# Altium PCB PCB_AIO.PcbDoc (part 1 of 2)
Units mm, origin at the board's own origin, x right, y up, seen from the top; angles counter-clockwise.
Board outline 99.69 x 91.46 mm, 2 copper layers (Top Layer, Bottom Layer), stack 0.325 mm thick; 117 components, 99 nets, 490 pads, 154 vias.
Unrouted connection lines stored in the file: 95.
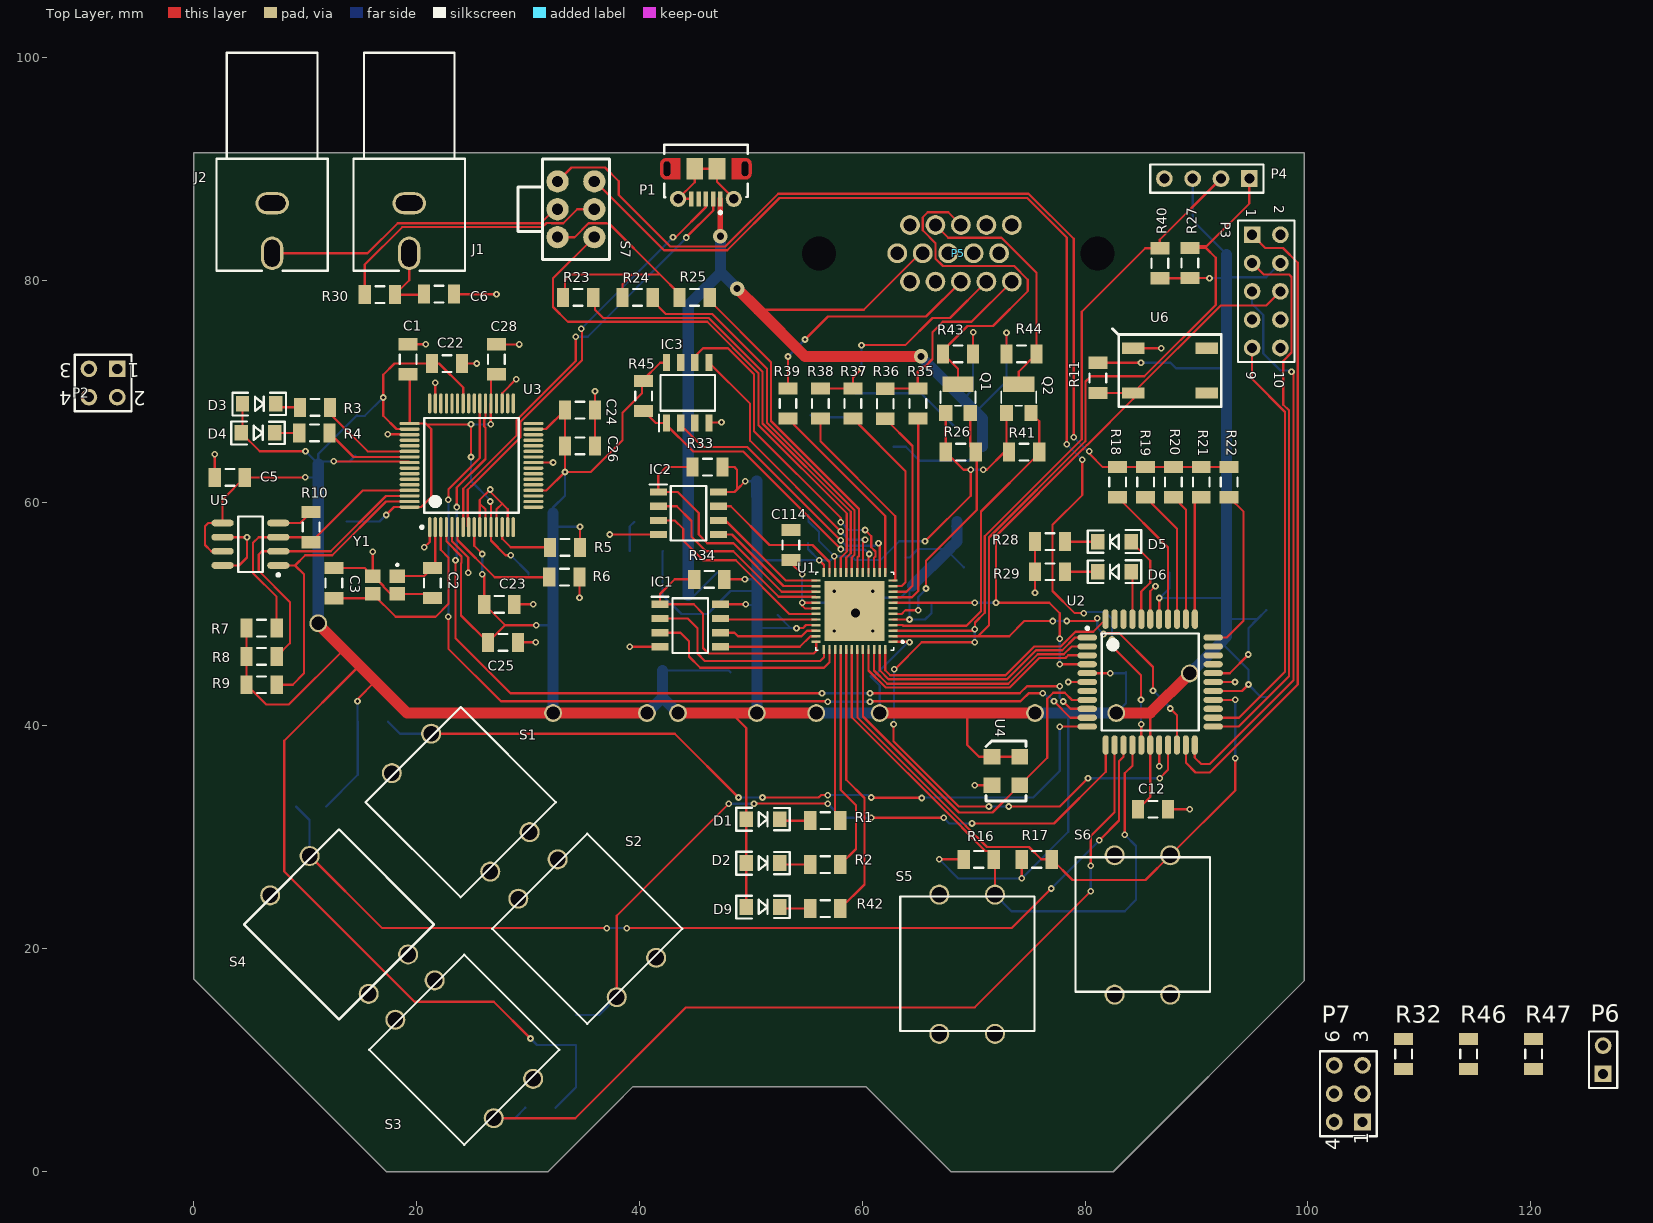
[diagram p0: Top Layer view]
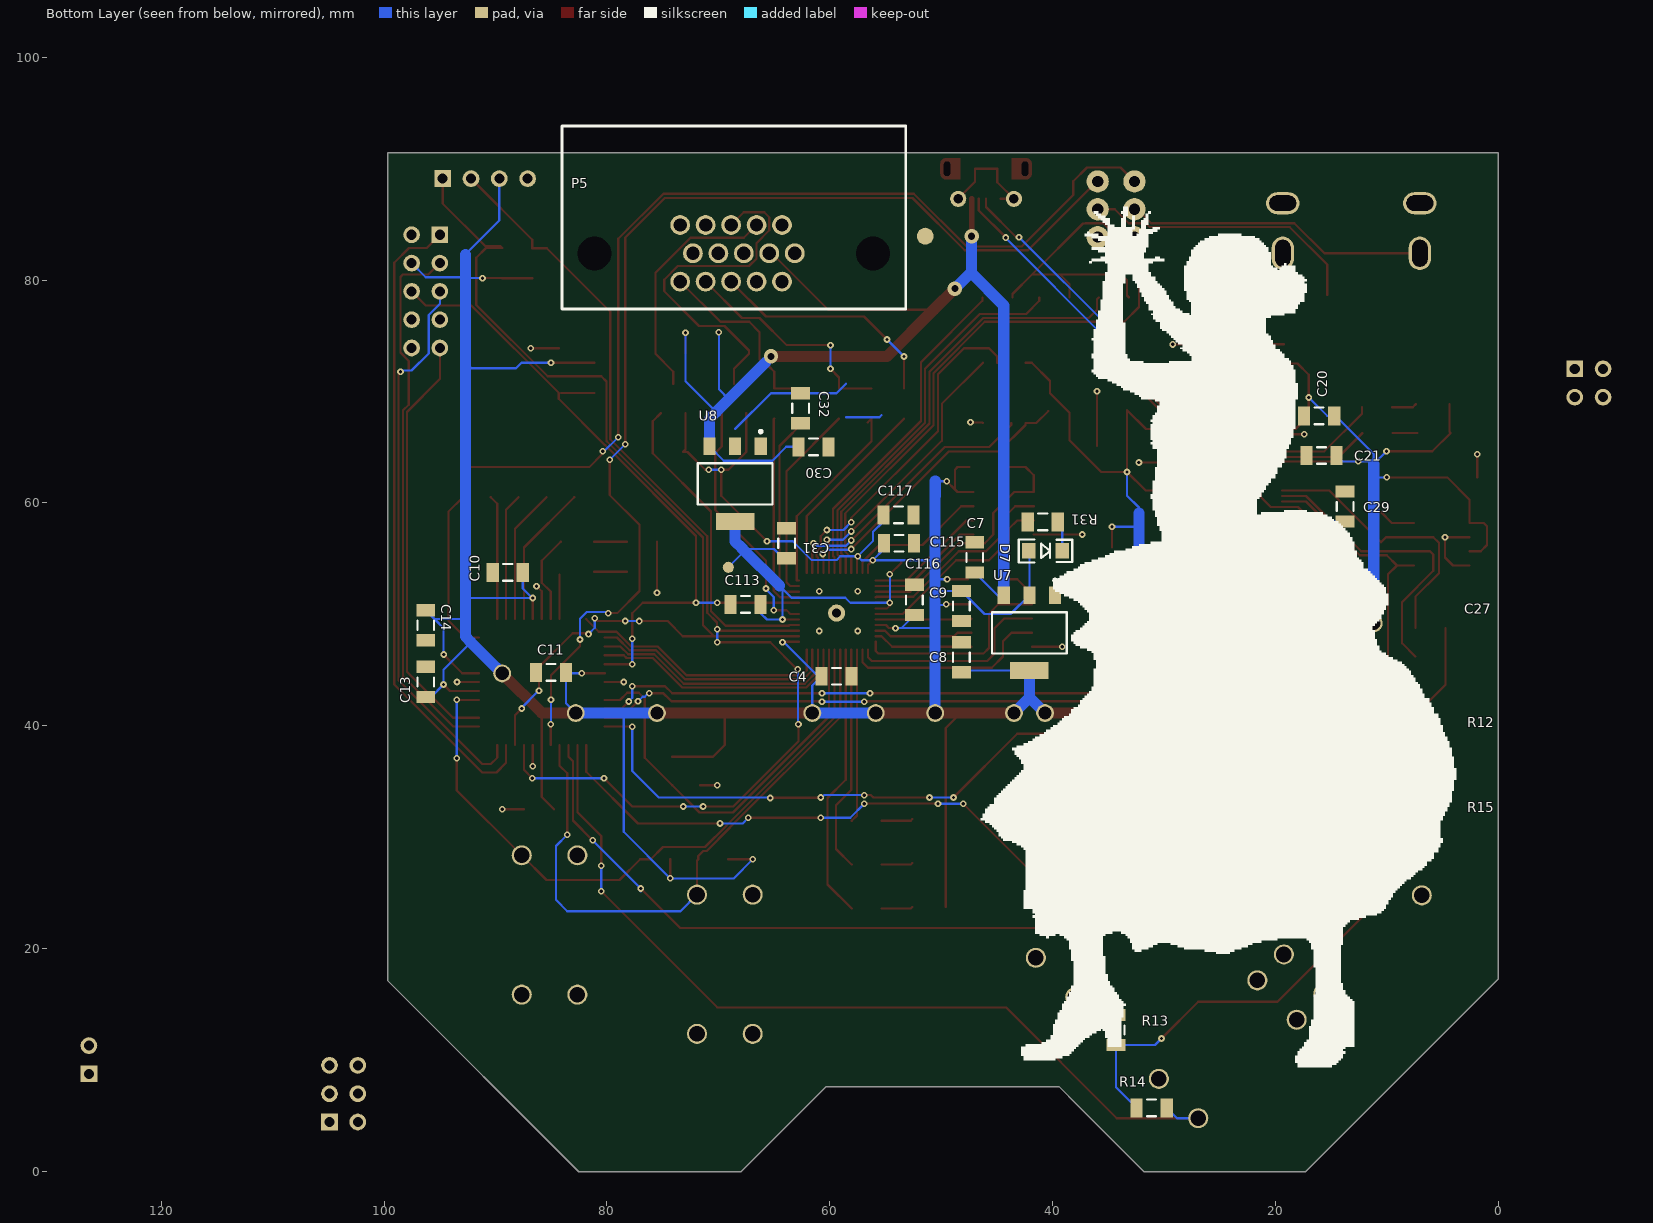
[diagram p1: Bottom Layer view, seen from below]

## Layer stack, top to bottom
Top Solder: solder mask 0.0102, Solder Resist, Dk 3.5
Top Layer: signal copper 0.0356
Dielectric 1: core 0.254, FR-4, Dk 4.2
Bottom Layer: signal copper 0.0356
Bottom Solder: solder mask 0.0102, Solder Resist, Dk 3.5

## Board outline
17.285,0 0,17.285 0,91.44 99.695,91.44 99.695,17.145 82.535,-0.015 67.96,-0.015 60.325,7.62 39.435,7.62 37.7,5.885 31.815,0
cut-out: 0,17.78

## Design rules (kind name [scope] priority, off if disabled: settings)
AssemblyTestpoint [All] p1: testpointundercomponent=TRUE minsize=1 maxsize=2.5 preferedsize=1.5 minholesize=0 maxholesize=1.016 preferedholesize=0.8 testpointgrid=0.025 usegrid=TRUE gridtolerance=0 allowsidetop=TRUE allowsidebottom=TRUE
Clearance [All] p1: gap=0.15 ignorepadtopadclearanceinfootprint=FALSE except(0: Arc-Hole Track-Hole SMDPad-Hole THPad-Hole Via-Hole Fill-Hole Poly-Hole Region-Hole Text-Hole; 0.3: Arc-Poly Track-Poly SMDPad-Poly THPad-Poly Via-Poly Fill-Poly Poly-Poly)
FabricationTestpoint [All] p1: side=3 testpointundercomponent=TRUE minsize=1 maxsize=2.54 preferedsize=1.5 minholesize=0 maxholesize=1.016 preferedholesize=0.8 testpointgrid=0.025 allowsidetop=TRUE allowsidebottom=TRUE usegrid=TRUE gridtolerance=0
HoleSize [All] p1: absolutevalues=TRUE maxlimit=4 minlimit=0.3 maxpercent=80.000 minpercent=20.000
HoleToHoleClearance [All] p1: gap=0.2 allowstackedmicrovias=TRUE
MinimumSolderMaskSliver [All] p1: minsoldermaskwidth=0.025
PlaneClearance [All] p1: clearance=0.4
PlaneConnect [All] p1: planeconnectstyle=Relief reliefexpansion=0.4 reliefentries=4 reliefconductorwidth=0.25 reliefairgap=0.2
PolygonConnect [All] p1: connectstyle=Relief reliefconductorwidth=0.25 reliefentries=4 polygonreliefangle="90 Angle" airgapwidth=0.25
RoomDefinition Arriquitaun2 [InComponentClass('Arriquitaun2')] p1: confinementstyle=ConfineIn formatcopy=TRUE lockcomponents=FALSE outline -25.4,-43.815 25.4,-43.815 25.4,-18.415 -25.4,-18.415
RoutingVias [All] p1: holewidth=0.3 width=0.6 viastyle="Through Hole" minholewidth=0.3 minwidth=0.6 maxholewidth=0.5 maxwidth=1
SilkToSilkClearance [All] p1: silktosilkclearance=0.2
SilkToSolderMaskClearance [IsPad] p1: minsilkscreentomaskgap=0.05 clearancetoexposedcopper=TRUE
SolderMaskExpansion [All] p1: expansion=0.102
Width [All] p1: maxlimit=1 minlimit=0.15 preferedwidth=0.2
21 further rules are at their usual default settings.

## Classes and differential pairs
component class Arriquitaun2: C1 C2 C3 C5 C6 C7 C8 C9 C10 C11 C12 C13 C14 C20 C21 C22 C23 C24 C25 C26 C27 C28 C29 C30 C31 C32 C113 C114 C115 C116 C117 D3 D4 D7 J1 J2 J3 P1 P3 P4 R3 R4 R5 R6 R7 R8 R9 R10 R27 R30 R31 R40 S7 U3 U5 U7 U8 Y1
component class Arriquitaun: C4 D1 D2 D5 D6 D9 IC1 IC2 IC3 P2 P5 P6 P7 Q1 Q2 R1 R2 R11 R12 R13 R14 R15 R16 R17 R18 R19 R20 R21 R22 R23 R24 R25 R26 R28 R29 R32 R33 R34 R35 R36 R37 R38 R39 R41 R42 R43 R44 R45 R46 R47 S1 S2 S3 S4 S5 S6 U1 U2 U4 U6

## Components (designator, comment, footprint, x,y, rotation, side; value= is the part's Value field where it differs from the comment)
C1 "Cap Pol1" C1206 19.245,72.898 r90 top value=10uF
C2 "Cap Semi" C1206 21.431,52.819 r270 top value=22pF
C3 "Cap Semi" C1206 12.581,52.806 r270 top value=22pF
C4 "Cap Semi" C1206 59.395,44.45 r0 bottom value=100nF
C5 "Cap Semi" C1206 3.246,62.3 r0 top value=100nF
C6 "Cap Semi" C1206 22.025,78.74 r180 top value=100nF
C7 "Cap Pol1" C1206 46.99,55.118 r90 bottom value=10uF
C8 "Cap Pol1" C1206 48.188,46.151 r90 bottom value=10uF
C9 "Cap Semi" C1206 48.188,50.751 r90 bottom value=100nF
C10 "Cap Semi" C1206 88.9,53.768 r180 bottom value=100nF
C11 "Cap Semi" C1206 85.028,44.801 r180 bottom value=100nF
C12 "Cap Semi" C1206 86.106,32.512 r180 top value=100nF
C13 "Cap Semi" C1206 96.266,43.942 r270 bottom value=100nF
C14 "Cap Semi" C1206 96.266,49.022 r90 bottom value=100nF
C20 "Cap Semi" C1206 16.081,67.818 r180 bottom value=100nF
C21 "Cap Semi" C1206 15.875,64.262 r180 bottom value=100nF
C22 "Cap Semi" C1206 22.733,72.517 r180 top value=100nF
C23 "Cap Semi" C1206 27.432,50.903 r180 top value=100nF
C24 "Cap Semi" C1206 34.671,68.33 r180 top value=100nF
C25 "Cap Semi" C1206 27.766,47.498 r180 top value=100nF
C26 "Cap Semi" C1206 34.671,65.133 r180 top value=100nF
C27 "Cap Semi" C1206 28.702,53.594 r0 bottom value=100nF
C28 "Cap Semi" C1206 27.178,72.898 r270 top value=100nF
C29 "Cap Semi" C1206 13.746,59.69 r270 bottom value=100nF
C30 "Cap Pol1" C1206 61.468,65.042 r180 bottom value=10uF
C31 "Cap Pol1" C1206 63.877,56.388 r90 bottom value=10uF
C32 "Cap Semi" C1206 62.611,68.507 r90 bottom value=100nF
C113 "Cap Semi" C1206 67.564,50.903 r180 bottom value=100nF
C114 "Cap Semi" C1206 53.594,56.226 r270 top value=100nF
C115 "Cap Semi" C1206 53.784,56.388 r0 bottom value=100nF
C116 "Cap Semi" C1206 52.409,51.308 r270 bottom value=100nF
C117 "Cap Semi" C1206 53.84,58.928 r0 bottom value=100nF
D1 "5988210107F" "1206 - LED" 51.099,31.628 r0 top
D2 "5988210107F" "1206 - LED" 51.099,27.686 r0 top
D3 "5988210107F" "1206 - LED" 5.883,68.89 r0 top
D4 "5988210107F" "1206 - LED" 5.783,66.29 r0 top
D5 "5988210107F" "1206 - LED" 82.647,56.53 r180 top
D6 "5988210107F" "1206 - LED" 82.647,53.83 r180 top
D7 "5988210107F" "1206 - LED" 40.635,55.702 r180 bottom
D9 "5988210107F" "1206 - LED" 51.099,23.745 r0 top
IC1 "IS62WVS2568FBLL-20NLI" SOIC127P600X175-8N 44.573,48.998 r0 top
IC2 "AT25SF041-SSHD-T" SOIC127P600X175-8N 44.411,59.073 r0 top
IC3 "AT25SF041-SSHD-T" SOIC127P600X175-8N 44.347,69.882 r90 top
J1 "RCA" 161 19.344,90.905 r90 top
J2 "RCA" 161 7.044,90.905 r90 top
P1 "47346-0001" USB-MICRO-B_V 45.974,88.646 r180 top
P2 "Header 2X2" HDR2X2 -6.858,72.04 r180 top
P3 "Header 5X2" HDR2X5 94.996,84.074 r270 top
P4 "Header 4" HDR1X4 94.742,89.114 r180 top
P5 "L77HDE15SD1CO" DVI-15 68.604,82.409 r180 top
P6 "Header 2" HDR1X2 126.492,8.763 r90 top
P7 "Header 3X2A" HDR2X3_CEN 104.902,4.445 r90 top
Q1 "BSS138P" *SOT23-W 68.604,69.375 r0 top
Q2 "BSS138P" *SOT23-W 74.051,69.375 r0 top
R1 "Res3" c1206 56.689,31.485 r180 top value=1K
R2 "Res3" c1206 56.689,27.543 r180 top value=1K
R3 "Res3" c1206 10.883,68.59 r180 top value=1K
R4 "Res3" c1206 10.833,66.29 r180 top value=1K
R5 "Res3" c1206 33.321,56.019 r180 top value=1K
R6 "Res3" c1206 33.274,53.34 r0 top value=12K
R7 "Res3" c1206 6.096,48.77 r180 top value=10K
R8 "Res3" c1206 6.096,46.23 r180 top value=10K
R9 "Res3" c1206 6.096,43.69 r180 top value=10K
R10 "Res3" c1206 10.541,57.835 r90 top value=10K
R11 "Res3" c1206 81.147,71.232 r270 top value=10K
R12 "Res3" c1206 16.081,40.386 r0 bottom value=10K
R13 "Res3" c1206 34.309,12.7 r90 bottom value=10K
R14 "Res3" c1206 31.115,5.715 r180 bottom value=10K
R15 "Res3" c1206 10.541,32.766 r180 bottom value=10K
R16 "Res3" c1206 70.461,28.02 r0 top value=10K
R17 "Res3" c1206 75.664,28.02 r0 top value=10K
R18 "Res3" c1206 82.93,61.87 r90 top value=10K
R19 "Res3" c1206 85.43,61.87 r90 top value=10K
R20 "Res3" c1206 87.93,61.87 r90 top value=10K
R21 "Res3" c1206 90.43,61.87 r90 top value=10K
R22 "Res3" c1206 92.93,61.87 r90 top value=10K
R23 "Res3" c1206 34.503,78.449 r180 top value=10K
R24 "Res3" c1206 39.843,78.449 r180 top value=10K
R25 "Res3" c1206 44.958,78.449 r180 top value=10K
R26 "Res3" c1206 68.85,64.576 r0 top value=10K
R27 "Res3" c1206 89.408,81.534 r90 top value=10K
R28 "Res3" c1206 76.862,56.53 r0 top value=1K
R29 "Res3" c1206 76.862,53.83 r0 top value=1K
R30 "Res3" c1206 16.709,78.7 r0 top value=10K
R31 "Res3" c1206 40.885,58.302 r180 bottom value=1K
R32 "Res3" c1206 108.585,10.541 r90 top value=10K
R33 "Res3" c1206 46.111,63.225 r180 top value=10K
R34 "Res3" c1206 46.273,53.149 r180 top value=10K
R35 "Res3" c1206 64.991,68.933 r270 top value=1K
R36 "Res3" c1206 62.068,68.912 r270 top value=510
R37 "Res3" c1206 59.166,68.933 r270 top value=1K
R38 "Res3" c1206 56.254,68.933 r270 top value=510
R39 "Res3" c1206 53.341,68.933 r270 top value=510
R40 "Res3" c1206 86.709,81.52 r90 top value=10K
R41 "Res3" c1206 74.531,64.576 r0 top value=10K
R42 "Res3" c1206 56.689,23.602 r180 top value=1K
R43 "Res3" c1206 68.604,73.39 r180 top value=10K
R44 "Res3" c1206 74.299,73.39 r0 top value=10K
R45 "Res3" c1206 40.386,69.596 r270 top value=10K
R46 "Res3" c1206 114.427,10.541 r90 top value=10K
R47 "Res3" c1206 120.269,10.541 r90 top value=10K
S1 "FSM100" FSM100 30.156,30.456 r135 top
S2 "FSM100" FSM100 29.134,24.484 r315 top
S3 "FSM100" FSM100 18.096,13.623 r315 top
S4 "FSM100" FSM100 19.245,19.482 r135 top
S5 "FSM100" FSM100 71.92,12.353 r90 top
S6 "FSM100" FSM100 87.65,15.883 r90 top
S7 "STSSS2222" SWITCH 34.309,86.36 r90 top
U1 "ICE40UP5K-SG48ITR50" *QFN50P700X700X100-49N_ICE40UP5K-SG48ITR50(Primary) 59.318,50.292 r180 top
U2 "ATmega644PA-AUR" 44A_N 85.852,43.929 r0 top
U3 "FT2232HL-Tray" LQFP-64_N 24.936,63.383 r90 top
U4 "7C-8.000MBB-T" OSCILADOR 72.898,35.953 r270 top
U5 "M93C46-WMN6P" SOP8_N 5.096,56.3 r0 top
U6 "EVQ-Q2D01W" PUSHBUTTON 87.63,71.882 r0 top
U7 "LD1117S33CTR" ZZ311 42.088,48.351 r180 bottom
U8 "TLV117112DCYR" ZZ311 68.5,61.708 r180 bottom
Y1 "NX3225SA-12MHZ" NX3225SA12000MHZSTDCSR1 17.181,52.641 r180 top

## Footprints (in the part's own frame and the unit in brackets; to place one, negate y for a bottom-side part, rotate by r counter-clockwise, add the part's x,y. Pads: shape width x height; smd on the part's side, far side on the other; paste and mask are expansions set on the pad)
44A_N [mm] "Thin QFP, 44-Leads, Body 10x10mm, Pitch 0.8mm, IPC Medium Density"
  oval 1.75x0.55 smd: 1(-5.65,4) 2(-5.65,3.2) 3(-5.65,2.4) 4(-5.65,1.6) 5(-5.65,0.8) 6(-5.65,0) 7(-5.65,-0.8) 8(-5.65,-1.6) 9(-5.65,-2.4) 10(-5.65,-3.2) 11(-5.65,-4) 23(5.65,-4) 24(5.65,-3.2) 25(5.65,-2.4) 26(5.65,-1.6) 27(5.65,-0.8) 28(5.65,0) 29(5.65,0.8) 30(5.65,1.6) 31(5.65,2.4) 32(5.65,3.2) 33(5.65,4)
  oval 0.55x1.75 smd: 12(-4,-5.65) 13(-3.2,-5.65) 14(-2.4,-5.65) 15(-1.6,-5.65) 16(-0.8,-5.65) 17(0,-5.65) 18(0.8,-5.65) 19(1.6,-5.65) 20(2.4,-5.65) 21(3.2,-5.65) 22(4,-5.65) 34(4,5.65) 35(3.2,5.65) 36(2.4,5.65) 37(1.6,5.65) 38(0.8,5.65) 39(0,5.65) 40(-0.8,5.65) 41(-1.6,5.65) 42(-2.4,5.65) 43(-3.2,5.65) 44(-4,5.65)
  silkscreen extent -5.77,-4.35 4.35,4.95, body extent -5,-5 5,5, height 1.2
161 [mil] "Two Conductor Jack (RCA), Right Angle, Thru-Hole, Body 10 x 10 x 13 mm (WxTxH)"
  oval 78x118 hole 55 slot 95 at 90 deg: 1A(-157.48,0)
  oval 118.11x78.74 hole 55 slot 95 at 0 deg: 2B(-334.49,0)
  silkscreen extent -397,-197 374,197
"1206 - LED" [mm]
  rect 1.2x1.4 smd paste+0.2: 1(-1.5,0) 2(1.5,0)
  silkscreen extent -2.4,-1.04 2.4,1.02
*QFN50P700X700X100-49N_ICE40UP5K-SG48ITR50(Primary) [mm]
  rect 0.81x0.22 smd: 1(-3.45,2.75) 2(-3.45,2.25) 3(-3.45,1.75) 4(-3.45,1.25) 5(-3.45,0.75) 6(-3.45,0.25) 7(-3.45,-0.25) 8(-3.45,-0.75) 9(-3.45,-1.25) 10(-3.45,-1.75) 11(-3.45,-2.25) 12(-3.45,-2.75) 25(3.45,-2.75) 26(3.45,-2.25) 27(3.45,-1.75) 28(3.45,-1.25) 29(3.45,-0.75) 30(3.45,-0.25) 31(3.45,0.25) 32(3.45,0.75) 33(3.45,1.25) 34(3.45,1.75) 35(3.45,2.25) 36(3.45,2.75)
  rect 0.22x0.81 smd: 13(-2.75,-3.45) 14(-2.25,-3.45) 15(-1.75,-3.45) 16(-1.25,-3.45) 17(-0.75,-3.45) 18(-0.25,-3.45) 19(0.25,-3.45) 20(0.75,-3.45) 21(1.25,-3.45) 22(1.75,-3.45) 23(2.25,-3.45) 24(2.75,-3.45) 37(2.75,3.45) 38(2.25,3.45) 39(1.75,3.45) 40(1.25,3.45) 41(0.75,3.45) 42(0.25,3.45) 43(-0.25,3.45) 44(-0.75,3.45) 45(-1.25,3.45) 46(-1.75,3.45) 47(-2.25,3.45) 48(-2.75,3.45)
  rect 5.4x5.4 smd: EP(0,0)
  silkscreen extent -4.41,-3.5 3.5,3.5
*SOT23-W [mm]
  rect 1.2x1.4 smd: 1(-1.1,-1.3) 2(1.1,-1.3)
  rect 2.8x1.4 smd: 3(0,1.3)
  silkscreen extent -1.57,-0.66 1.57,0.66
C1206 [mm] "Chip Capacitor, Body 3.2x1.6mm, IPC High Density"
  rect 1.1x1.7 smd: 1(-1.35,0) 2(1.35,0)
  silkscreen extent -0.4,-0.75 0.4,0.75, body extent -1.7,-0.9 1.7,0.9, height 1.3
c1206 [mm] "Chip Capacitor, Body 3.2x1.6mm, IPC High Density"
  rect 1.1x1.7 smd: 1(-1.35,0) 2(1.35,0)
  silkscreen extent -0.4,-0.75 0.4,0.75, body extent -1.7,-0.9 1.7,0.9, height 1.3
DVI-15 [mil]
  round 70 hole 47: 1(-190,100) 2(-100,100) 3(-10,100) 4(80,100) 5(170,100) 6(-145,0) 7(-55,0) 8(35,0) 9(125,0) 10(215,0) 11(-190,-100) 12(-100,-100) 13(-10,-100) 14(80,-100) 15(170,-100)
  round 0 hole 120 unplated: ""(-492,0) ""(492,0)
FSM100 [mm] "Switch button"
  round 1.8 hole 1.4: 0(0,0) 1(12.5,0) 2(12.5,5) 3(0,5)
  silkscreen extent 0.25,-3.56 12.32,8.51
HDR1X2 [mm] "Connector; Header; 2 Position"
  rect 1.5x1.5 hole 0.9: 1(0,0)
  round 1.5 hole 0.9: 2(2.54,0)
  silkscreen extent -1.27,-1.27 3.81,1.27
HDR1X4 [mm] "Connector; Header; 4 Position"
  rect 1.5x1.5 hole 0.9: 1(0,0)
  round 1.5 hole 0.9: 2(2.54,0) 3(5.08,0) 4(7.62,0)
  silkscreen extent -1.27,-1.27 8.89,1.27
HDR2X2 [mm] "Connector; Header; 2x2 Position"
  rect 1.5x1.5 hole 0.9: 1(0,0)
  round 1.5 hole 0.9: 2(0,2.54) 3(2.54,0) 4(2.54,2.54)
  silkscreen extent -1.27,-1.27 3.81,3.81
HDR2X3_CEN [mm] "Connector; Header; 3x2 Position"
  rect 1.5x1.5 hole 0.9: 1(0,0)
  round 1.5 hole 0.9: 2(2.54,0) 3(5.08,0) 4(0,2.54) 5(2.54,2.54) 6(5.08,2.54)
  silkscreen extent -1.27,-1.27 6.35,3.81
HDR2X5 [mm] "Connector; Header; 5x2 Position"
  rect 1.5x1.5 hole 0.9: 1(0,0)
  round 1.5 hole 0.9: 2(0,2.54) 3(2.54,0) 4(2.54,2.54) 5(5.08,0) 6(5.08,2.54) 7(7.62,0) 8(7.62,2.54) 9(10.16,0) 10(10.16,2.54)
  silkscreen extent -1.27,-1.27 11.43,3.81
LQFP-64_N [mm] "Thin QFP, 64-Leads, Body 10x10mm, Pitch 0.5mm, IPC Medium Density"
  oval 1.8x0.3 smd: 1(-5.55,3.75) 2(-5.55,3.25) 3(-5.55,2.75) 4(-5.55,2.25) 5(-5.55,1.75) 6(-5.55,1.25) 7(-5.55,0.75) 8(-5.55,0.25) 9(-5.55,-0.25) 10(-5.55,-0.75) 11(-5.55,-1.25) 12(-5.55,-1.75) 13(-5.55,-2.25) 14(-5.55,-2.75) 15(-5.55,-3.25) 16(-5.55,-3.75) 33(5.55,-3.75) 34(5.55,-3.25) 35(5.55,-2.75) 36(5.55,-2.25) 37(5.55,-1.75) 38(5.55,-1.25) 39(5.55,-0.75) 40(5.55,-0.25) 41(5.55,0.25) 42(5.55,0.75) 43(5.55,1.25) 44(5.55,1.75) 45(5.55,2.25) 46(5.55,2.75) 47(5.55,3.25) 48(5.55,3.75)
  oval 0.3x1.8 smd: 17(-3.75,-5.55) 18(-3.25,-5.55) 19(-2.75,-5.55) 20(-2.25,-5.55) 21(-1.75,-5.55) 22(-1.25,-5.55) 23(-0.75,-5.55) 24(-0.25,-5.55) 25(0.25,-5.55) 26(0.75,-5.55) 27(1.25,-5.55) 28(1.75,-5.55) 29(2.25,-5.55) 30(2.75,-5.55) 31(3.25,-5.55) 32(3.75,-5.55) 49(3.75,5.55) 50(3.25,5.55) 51(2.75,5.55) 52(2.25,5.55) 53(1.75,5.55) 54(1.25,5.55) 55(0.75,5.55) 56(0.25,5.55) 57(-0.25,5.55) 58(-0.75,5.55) 59(-1.25,5.55) 60(-1.75,5.55) 61(-2.25,5.55) 62(-2.75,5.55) 63(-3.25,5.55) 64(-3.75,5.55)
  silkscreen extent -5.67,-4.25 4.25,4.57, body extent -5,-5 5,5, height 1.6
NX3225SA12000MHZSTDCSR1 [mm]
  rect 1.4x1.2 smd: 1(-1.1,-0.8) 2(1.1,-0.8) 3(1.1,0.8) 4(-1.1,0.8)
  silkscreen extent -1.2,-1.9 -1,-1.7
OSCILADOR [mm]
  rect 1.4x1.5 smd mask+0.001: 1(-1.275,-1.25) 2(1.275,-1.25) 3(1.275,1.25) 4(-1.275,1.25)
  silkscreen extent -2.7,-1.8 2.7,1.8
PUSHBUTTON [mm]
  rect 2x1 smd: 1(-3.3,2) 2(3.3,2) 3(-3.3,-2) 4(3.3,-2)
  silkscreen extent -5.15,-3.25 4.6,3.75, body extent -3.3,-3.25 3.3,3.25, height 5
SOIC127P600X175-8N [mm]
  rect 1.525x0.65 smd: 1(-2.712,1.905) 2(-2.712,0.635) 3(-2.712,-0.635) 4(-2.712,-1.905) 5(2.712,-1.905) 6(2.712,-0.635) 7(2.712,0.635) 8(2.712,1.905)
  silkscreen extent -3.47,-2.45 1.6,2.58, body extent -3,-2.45 3,2.45, height 1.75
SOP8_N [mm] "SOIC, 8-Leads, Body 4.9x3.9mm, Pitch 1.27mm, IPC Medium Density"
  oval 2x0.6 smd: 1(2.5,-1.905) 2(2.5,-0.635) 3(2.5,0.635) 4(2.5,1.905) 5(-2.5,1.905) 6(-2.5,0.635) 7(-2.5,-0.635) 8(-2.5,-1.905)
  silkscreen extent -1.1,-2.88 2.63,2.5, body extent -2,-2.5 2,2.5, height 1.75
SWITCH [mm]
  round 2 hole 1: 1(-2.5,1.65) 2(0,1.65) 3(2.5,1.65) 4(-2.5,-1.65) 5(0,-1.65) 6(2.5,-1.65)
  silkscreen extent -4.5,-3 4.5,5.2, body extent -4.5,-3 4.5,5, height 3.5
USB-MICRO-B_V [mm] "USB, MICRO B, Body 7.491x4.695 mm, Pitch 0.65 mm"
  rect 0.4x1.35 smd: 1(-1.3,1.35) 2(-0.65,1.35) 3(0,1.35) 4(0.65,1.35) 5(1.3,1.35)
  round 1.45 hole 0.85: 6(-2.5,1.35) 7(2.5,1.35)
  rrect50% 0x0 hole 0.6 slot 1.3 at 90 deg: 8(-3.5,-1.35) 11(3.5,-1.35)
  rect 1.5x1.9 smd: 9(-1,-1.35) 10(1,-1.35)
  Top Layer region: 2.3,-0.4 2.3,-2.3 3.6,-2.3 3.6,-0.4
  Top Layer region: 3.6,-0.9 3.6,-1.8 4.1,-1.8 4.1,-0.9
  Top Layer region: -2.3,-2.3 -2.3,-0.4 -3.6,-0.4 -3.6,-2.3
  Top Layer region: -3.6,-1.8 -3.6,-0.9 -4.1,-0.9 -4.1,-1.8
  Top Layer lines w0.5: 3.5,-0.671 cw(c3.6,-0.9) 3.5,-1.129 cw(c3.6,-0.9) 3.473,-1.115 cw(c3.6,-0.9) 3.35,-0.9 cw(c3.6,-0.9) 3.35,-0.889 cw(c3.6,-0.9) 3.5,-0.671 ; 3.432,-1.985 ccw(c3.6,-1.8) 3.35,-1.8 ccw(c3.6,-1.8) 3.432,-1.985 ; -3.378,-1.015 ccw(c-3.6,-0.9) -3.85,-0.9 ccw(c-3.6,-0.9) -3.378,-1.015 ; -3.432,-1.985 ccw(c-3.6,-1.8) -3.85,-1.8 ccw(c-3.6,-1.8) -3.432,-1.985
  silkscreen extent -3.75,-3.5 3.75,2.7, body extent -4.1,-3.9 4.1,1.5, height 2.67
ZZ311 [mm] "SOT-223/SC-73; 4 Leads; Body 6.7 x 7.3 mm, inc. leads (LxW max)"
  rect 1.1x1.55 smd: 1(2.3,3.375) 2(0,3.375) 3(-2.3,3.375)
  rect 3.45x1.55 smd: 4(0,-3.375)
  silkscreen extent -3.35,-1.85 3.35,4.82

## Part data
C1 C7 C8 C30 C31: "Polarized Capacitor (Radial)", Supplier Part Number 1=810-C3216X5R1C106M, LatestRevisionDate=17-Jul-2002, LatestRevisionNote="Re-released for DXP Platform.", PackageDescription="Polarized Capacitor (Radial); 2 Leads", PackageReference=RB7.6-15, Published=8-Jun-2000, Publisher="Altium Limited", Supplier 1=Mouser
C2 C3 C5: "Capacitor (Semiconductor SIM Model)", LatestRevisionDate=29-May-2009, LatestRevisionNote="IPC-7351 Footprint Added.", PackageDescription="Chip Capacitor", PackageReference=C1206, Published=8-Jun-2000, Publisher="Altium Limited"
  C5: Supplier 1=Mouser
C4 C6 C9 C32: "Capacitor (Semiconductor SIM Model)", Supplier Part Number 1=1759123, LatestRevisionDate=29-May-2009, LatestRevisionNote="IPC-7351 Footprint Added.", PackageDescription="Chip Capacitor", PackageReference=C1206, Published=8-Jun-2000, Publisher="Altium Limited", Supplier 1=Farnell
C10 C11 C12 C13 C14 C20 C21 C22 C23 C24 C25 C26 C27 C28 C29 C113 C114 C115 C116 C117: "Capacitor (Semiconductor SIM Model)", Supplier Part Number 1=81-GRM31CR72D104KW3L, LatestRevisionDate=29-May-2009, LatestRevisionNote="IPC-7351 Footprint Added.", PackageDescription="Chip Capacitor", PackageReference=C1206, Published=8-Jun-2000, Publisher="Altium Limited", Supplier 1=Mouser
D1 D2 D3 D4 D5 D6 D7 D9: "LED, Rojo, Montaje Superficial, 1206 (Métrico 3216), 20 mA, 2 V, 640 nm", Supplier Part Number 1=1465997, ComponentLink1Description=Mouser, ComponentLink1URL=https://eu.mouser.com/ProductDetail/Dialight/598-8210-107F?qs=sGAEpiMZZMseGfSY3csMkcUUSK%2FIVnSgwPTZO%252Bt9HCE%3D, LatestRevisionDate=17-Jul-2002, LatestRevisionNote="Re-released for DXP Platform.", PackageDescription="SM LED; 2 Flat Leads", PackageReference=3.2X1.6X1.1, PackageVersion=Feb-2002, Published=8-Jun-2000, Publisher="Altium Limited", Supplier 1=Farnell, Supplier 2=Mouser, Supplier Part Number 2=645-598-8210-107F
IC1: "SRAM 2Mb 256Kx8 20MHz 2.2-3.6V Serial SRAM", Manufacturer_Name="Integrated Silicon Solution Inc.", Mouser Part Number=870-WVS2568FBLL20NLI, ComponentLink1Description=Mouser, ComponentLink1URL=https://www.mouser.es/ProductDetail/ISSI/IS62WVS2568FBLL-20NLI?qs=sGAEpiMZZMs6Aik9Fp479pkTONfEyU%252BtPqF9anFQNgY%3D, Datasheet Link=http://www.issi.com/WW/pdf/IS62-65WVS2568FALL-BLL.pdf, Height=1.75mm, Manufacturer_Part_Number=IS62WVS2568FBLL-20NLI, Mouser Price/Stock=https://www.mouser.com/Search/Refine.aspx?Keyword=870-WVS2568FBLL20NLI, Supplier 1=Mouser, Supplier Part Number 1=870-WVS2568FBLL20NLI
IC2 IC3: "Flash NOR 4Mb, 2.5-3.6V,104Mhz Serial Flash", Manufacturer_Name="Adesto Technologies", Mouser Part Number=988-AT25SF041-SSHD-T, ComponentLink1Description=Mouser, ComponentLink1URL=https://www.mouser.es/ProductDetail/Adesto-Technologies/AT25SF041-SSHD-T?qs=sGAEpiMZZMtI%252BQ06EiAoG2tRW1ubUobjTmCSnL3k0Dw%3D, Datasheet Link=https://www.adestotech.com/wp-content/uploads/DS-AT25SF041_044.pdf, Height=1.75mm, Manufacturer_Part_Number=AT25SF041-SSHD-T, Mouser Price/Stock=https://www.mouser.com/Search/Refine.aspx?Keyword=988-AT25SF041-SSHD-T, Supplier 1=Mouser, Supplier 2=Farnell, Supplier Part Number 1=988-AT25SF041-SSHD-T, Supplier Part Number 2=2909988
J1 J2: "RCA Phono Jack, Right Angle, Thru-Hole, Snap-In", PackageDocument=7-Jul-2000, ComponentLink1Description="Manufacturer Link", ComponentLink1URL=http://www.mouser.com/kobiconn/, DatasheetDocument=7-Jul-2000, DrillAndSlotSize="Corresponds to nominal value.", LatestRevisionDate=15-Jul-2004, LatestRevisionNote="Component Replaced.", PackageReference=161, PCB_Layout="Complies with manufacturer's recommendation.", Published=15-Jul-2004, Publisher="Altium Limited"
P1: "Conectores USB MICRO USB B RECPT BTTM MOUNT ASSY", Supplier Part Number 1=538-47346-0001, ComponentLink1Description=Mouser, ComponentLink1URL=https://eu.mouser.com/ProductDetail/Molex/47346-0001?qs=%2Fha2pyFadugJe2m2PwsxZF%2FSs5SLGnHK0WVEsekv2hnqwx5TiE8qVw%3D%3D&utm_source=octopart&utm_medium=aggregator&utm_campaign=538-47346-0001&utm_content=Molex, Supplier 1=Mouser, Supplier 2=Farnell, Supplier Part Number 2=2119232
P2: "Header, 2-Pin, Dual row", LatestRevisionDate=17-Jul-2002, LatestRevisionNote="Re-released for DXP Platform.", Publisher="Altium Limited"
P3: "Header, 5-Pin, Dual row", Supplier Part Number 1=1593415, LatestRevisionDate=17-Jul-2002, LatestRevisionNote="Re-released for DXP Platform.", Publisher="Altium Limited", Supplier 1=Farnell
P4: "Header, 4-Pin", LatestRevisionDate=17-Jul-2002, LatestRevisionNote="Re-released for DXP Platform.", Publisher="Altium Limited"
P5: "D-Sub High Density Connectors D SUB", ComponentLink1Description=Mouser, ComponentLink1URL=https://www.mouser.es/ProductDetail/Amphenol-Commercial-Products/L77HDE15SD1CO?qs=sGAEpiMZZMvlX3nhDDO4AIhmb3wSIX3bv9XlW7v%2F%2FAg=, Supplier 1=Mouser
P6: "Header, 2-Pin", LatestRevisionDate=17-Jul-2002, LatestRevisionNote="Re-released for DXP Platform.", Publisher="Altium Limited"
P7: "Header, 3-Pin, Dual row", LatestRevisionDate=17-Jul-2002, LatestRevisionNote="Re-released for DXP Platform.", Publisher="Altium Limited"
Q1 Q2: "MOSFET N-CH 60 V 360 mA", Supplier Part Number 1=1727-1142-6-ND, ComponentLink1Description=Mouser, ComponentLink1URL=https://www.mouser.es/ProductDetail/Nexperia/BSS138P215?qs=sGAEpiMZZMuW3D0gRv32gn9EhwRhF9cb, Supplier 1=Digi-Key, Supplier 2=Farnell, Supplier 3=Mouser, Supplier Part Number 2=1859849RL, Supplier Part Number 3=771-BSS138P215
R1 R2 R3 R4 R5 R28 R29 R31 R42: "Resistor", Supplier Part Number 1=2073475, LatestRevisionDate=29-May-2009, LatestRevisionNote="IPC-7351 Footprint Added.", PackageDescription="Chip Resistor", PackageReference=J1-0603, Published=8-Jun-2000, Publisher="Altium Limited", Supplier 1=Farnell
R6 R7 R8 R9 R10 R12 R13 R14 R15 R16 R17 R18 R19 R20 R21 R22 R23 R24 R25 R26 R35 R36 R37 R38 R39 R41 R43 R44: "Resistor", LatestRevisionDate=29-May-2009, LatestRevisionNote="IPC-7351 Footprint Added.", PackageDescription="Chip Resistor", PackageReference=J1-0603, Published=8-Jun-2000, Publisher="Altium Limited"
  R6: Supplier 1=Farnell
R11 R27 R30 R32 R33 R34 R40 R45 R46 R47: "Resistor", Supplier Part Number 1=2073356, LatestRevisionDate=29-May-2009, LatestRevisionNote="IPC-7351 Footprint Added.", PackageDescription="Chip Resistor", PackageReference=J1-0603, Published=8-Jun-2000, Publisher="Altium Limited", Supplier 1=Farnell
S1 S2 S3 S4 S5 S6: "Interruptores táctiles 12mm FLSH OFF-(ON)", Supplier Part Number 1=506-FSM100, LatestRevisionDate=17-Jul-2002, LatestRevisionNote="Re-released for DXP Platform.", PackageDescription="Switch; 2 Leads", PackageReference=SPST-2, Published=24-Mar-1999, Publisher="Altium Limited", Supplier 1=Mouser, Supplier 2=Farnell, Supplier Part Number 2=1570388
S7: "Interruptor Deslizante, DPDT, Taladro Pasante, Serie STSS2, 300 mA", Supplier Part Number 1=1123873, Supplier 1=Farnell, Supplier 2=Newark, Supplier Part Number 2=34M8660
U1: "iCE40 UltraPlus 5280 LUTs 39 I/O 1.2 V Surface Mount FOPGA - QFN-48", Package="QFN-48 Lattice Semiconductor", Supplier Part Number 1=842-E40UP5KSG48ITR50, Availability=Unavailable, MF="Lattice Semiconductor", MP=ICE40UP5K-SG48ITR50, Price=None, SnapEDA_Link=https://www.snapeda.com/parts/ICE40UP5K-SG48ITR50/Lattice%20Semiconductor%20Corporation/view-part/?ref=snap, Supplier 1=Mouser, Supplier 2=Digi-Key, Supplier 3=Mouser, Supplier Part Number 2=220-2145-6-ND
U2: "8-bit AVR Microcontroller, 64KB Flash, 2KB EEPROM, 4KB SRAM, 44-pin TQFP, Industrial Grade (-40°C to 85°C), Reel", Supplier Part Number 1=556-ATMEGA644PA-AU, ComponentLink1Description="Manufacturer Link", ComponentLink1URL=http://www.atmel.com/products/avr/default.asp?, ComponentLink2Description="ATmega164A/164PA/324A/324PA/644A/644PA/1284/1284P Datasheet", ComponentLink2URL=http://www.atmel.com/dyn/resources/prod_documents/doc8272.pdf, ComponentLink3Description="ATmega164A/164PA/324A/324PA/644A/644PA/1284/1284P Summary", ComponentLink3URL=http://www.atmel.com/dyn/resources/prod_documents/8272S.pdf, ComponentLink4Description="Atmel.com Home", ComponentLink4URL=http://www.atmel.com, DatasheetVersion="revA, Jan-2010", PackageDescription="44-Pin Plastic Thin Profile Quad Flat Pack, 10 x 10 x 1.0 mm Body, 0.8 mm Pitch (TQFP)", PackageReference=44A, PackageVersion="rev.B, Oct-2001", Published=1-Apr-2010, Publisher="Altium Limited", Supplier 1=Mouser, Supplier 2=Farnell, Supplier Part Number 2=2484915
U3: "Dual High Speed USB To Multipurpose UART/FIFO IC, 64-pin LQFP, Tray", Manufacturer=FTDI, Supplier Part Number 1=895-FT2232HL, ComponentLink1Description="Manufacturer URL", ComponentLink1URL=http://www.ftdichip.com/, ComponentLink2Description=Datasheet, ComponentLink2URL=http://www.ftdichip.com/Support/Documents/DataSheets/ICs/DS_FT2232H.pdf, DatasheetVersion="ver 2.21, Jun-2012", PackageDescription="64-Pin Thin Quad Flat Pack, 10 x 10 x 1.4 mm Body, 0.5 mm Pitch", PackageReference=LQFP-64, PackageVersion=Jun-12, PartNumber=FT2232HL-Tray, Supplier 1=Mouser, Supplier 2=Digi-Key, Supplier Part Number 2=768-1347-ND
U4: "Osciladores de reloj estándar 8 8.000MHz 3.3V50ppm(-10 +70C)", Supplier Part Number 1=717-7C-8.000MBB-T, ComponentLink1Description=Mouser, ComponentLink1URL=https://eu.mouser.com/ProductDetail/TXC-Corporation/7C-8000MBB-T?qs=%2Fha2pyFadugqK0KALn7gcPodYjrkh5fvaJ0tcmnA4H9lIK6XFORkGg%3D%3D, Supplier 1=Mouser, Supplier 2=Farnell, Supplier 3=Arrow, Supplier Part Number 2=1842054, Supplier Part Number 3=7C-8.000MBB-T
U5: "EEPROM 1 Kbit (128 x 8) 2.5V to 5.5V EEProm", Supplier Part Number 1=511-M93C46-WMN6P, Supplier 1=Mouser, Supplier 2=Farnell, Supplier 3=Digi-Key, Supplier Part Number 2=1224432, Supplier Part Number 3=497-8590-5-ND
U6: "Interruptores táctiles Switch Light Touch 6mm Square SMD", Supplier Part Number 1=667-EVQ-Q2D01W, Supplier 1=Mouser, Supplier 2=Farnell, Supplier Part Number 2=1821242RL
U7: "800mA and 1A Low Dropout Positive Regulator 2.85V, 3.3V, 5V, and Adjustable", Supplier Part Number 1=595-REG1117-3.3/2K5, ComponentLink1Description="Manufacturer Link", ComponentLink1URL=http://www.ti.com/, ComponentLink2Description=Datasheet, ComponentLink2URL=http://www-s.ti.com/sc/ds/REG1117.pdf, DatasheetVersion=Sep-1997, LatestRevisionDate=17-Jul-2002, LatestRevisionNote="Re-released for DXP Platform.", PackageDescription="SOT-223/SC-73; 4 Leads; Body 6.7 x 7.3 mm, inc. leads (LxW max)", PackageReference=ZZ311, PackageVersion=revC, Published=8-Jun-2000, Publisher="Altium Limited", Supplier 1=Mouser, Supplier 2=Farnell, Supplier 3=Digi-Key, Supplier 4=Farnell, Supplier Part Number 2=1467779, Supplier Part Number 3=497-1241-6-ND, Supplier Part Number 4=2253482
U8: "Reguladores de voltaje LDO 1A + Fixed Vltg Lo-Drpout Linear Reg", Supplier Part Number 1=595-TLV117112DCYR, ComponentLink1Description="Manufacturer Link", ComponentLink1URL=http://www.ti.com/, ComponentLink2Description=Datasheet, ComponentLink2URL=http://www-s.ti.com/sc/ds/REG1117.pdf, DatasheetVersion=Sep-1997, LatestRevisionDate=17-Jul-2002, LatestRevisionNote="Re-released for DXP Platform.", PackageDescription="SOT-223/SC-73; 4 Leads; Body 6.7 x 7.3 mm, inc. leads (LxW max)", PackageReference=ZZ311, PackageVersion=revC, Published=8-Jun-2000, Publisher="Altium Limited", Supplier 1=Mouser, Supplier 2=Digi-Key, Supplier Part Number 2=296-40595-1-ND
Y1: library part NX3225SA-12MHZ-STD-CSR-3, "Crystal or Oscillator", Manufacturer_Name=NDK, Manufacturer_Part_Number=NX3225SA-24.000M-STD-CSR-3, Mouser Part Number=344-NX3225SA24MSTSR3, RS Part Number=1847826, Supplier Part Number 1=344-NX3225SA12MCSR3, ComponentLink2Description=Mouser, ComponentLink2URL=NX3225SA-12MHZ-STD-CSR-3, Datasheet Link=https://media.digikey.com/pdf/Data%20Sheets/NDK%20PDFs/NX3225SA_STD-CSR-3.pdf, Height=0.6mm, Mouser Price/Stock=https://www.mouser.com/Search/Refine.aspx?Keyword=344-NX3225SA24MSTSR3, RS Price/Stock=http://uk.rs-online.com/web/p/products/1847826, Supplier 1=Mouser, Supplier 2=Digi-Key, Supplier Part Number 2=644-1179-6-ND

## Free pads (board coordinates)
  round 1.6 hole 1.2: 2(11.176,49.201) 2(32.258,41.148) 2(40.686,41.148) 2(43.474,41.148) 2(50.546,41.148) 2(55.88,41.148) 2(61.568,41.148) 2(75.512,41.148) 2(82.804,41.148) 2(89.408,44.704)
  round 1.524 hole 0.8: 3(59.395,50.117)
  round 1.524 smd far side: 4(51.435,83.947)
  round 1 smd far side: 5(69.111,54.229)

## Via types
v1: diameter 0.6, hole 0.3, Top Layer to Bottom Layer, 151 vias
v2: diameter 1.3, hole 0.65, Top Layer to Bottom Layer, 3 vias

## Nets (pads, with @x,y where several pads share a name; then routed paths per layer and width w, separated by ;. In a path a pad name is that pad's centre, name@x,y a point inside that pad or via, vN(x,y) a via of type N, cw(c..) or ccw(c..) an arc to the next point about the centre after c; other vN are vias at no path point)
/CS_CONF: P6.1 P7.5 U1.16 U3.21
/CS_FLASH: IC2.1 R33.2 U1.27 | length 23.9
  Top Layer w0.2: R33.2 42.44,63.225 41.699,62.484 IC2.1 43.451,60.978 45.324,59.105 45.324,57.168 46.104,56.388 48.441,56.388 52.787,52.042 U1.27
/CS_RAM: IC1.1 R34.2 U1.36 | length 23.1
  Top Layer w0.2: R34.2 43.18,53.149 41.861,51.83 IC1.1 44.886,50.903 45.72,50.068 45.72,46.99 46.228,46.482 55.626,46.482 55.868,46.724 U1.36
/CS_uC: U1.48 U2.44 | length 23.9
  Top Layer w0.2: U1.48 62.068,44.993 62.526,44.535 72.861,44.535 75.455,47.129 77.811,47.129 79.136,48.454 80.728,48.454 U2.44
AUDIO: R30.1 S7.5 | length 25.4
  Top Layer w0.2: R30.1 15.359,81.399 18.72,84.76 31.296,84.76 31.662,85.126 32.125,85.126 32.141,85.11 33.177,85.11 34.427,86.36 S7.5
AUDIO_FPGA: S7.4 U1.21 | length 50.1
  Top Layer w0.2: S7.4 32.258,80.159 32.258,77.59 33.586,76.262 46.089,76.262 50.682,71.668 50.682,67.003 58.618,59.068 58.618,55.636 58.068,55.086 U1.21
AUDIO_UC: S7.6 U2.16 | length 100.4
  Top Layer w0.2: S7.6 36.043,88.86 42.223,82.681 47.883,82.681 52.578,87.376 74.803,87.376 78.359,83.82 v1(78.359,65.278) ; v1(79.756,63.881) 79.756,60.706 77.089,58.039 77.089,52.093 79.065,50.117 v1(79.883,50.117) ; v1(82.423,47.752) 82.423,47.137 85.028,44.532 v1(85.028,42.329) ; U2.16 v1(85.052,40.132)
  Bottom Layer w0.2: v1(78.359,65.278) v1(79.756,63.881) ; v1(79.883,50.117) 79.973,50.207 81.825,50.207 82.423,49.609 v1(82.423,47.752) ; v1@85.028,40.324 v1(85.028,42.329)
BTN1: R12.2 S1.1 U2.11 | length 70.8
  Top Layer w0.2: S1.1 43.171,39.294 v1(48.895,33.57) ; v1(51.054,33.57) 56.084,33.57 56.296,33.782 v1(56.896,33.782) ; v1(60.81,33.57) 60.831,33.549 65.329,33.549 v1(65.35,33.528) ; v1(77.724,39.929) U2.11
  Bottom Layer w0.2: R12.2 18.523,39.294 S1.1 ; v1(48.895,33.57) v1(51.054,33.57) ; v1(56.896,33.782) 60.49,33.782 60.702,33.57 v1(60.81,33.57) ; v1@65.35,33.57 75.346,33.57 77.724,35.948 v1(77.724,39.929)
BTN2: R13.2 S2.1 U2.12 | length 64.7
  Top Layer w0.2: S2.1 37.973,22.959 v1(48.013,32.999) ; v1(50.292,33.02) v1(56.896,33.02) ; v1(60.81,31.75) v1(67.31,31.75) ; v1(69.85,31.242) 77.216,31.242 81.852,35.878 U2.12
  Bottom Layer w0.2: R13.2 36.378,14.05 S2.1 ; v1(48.013,32.999) 50.271,32.999 v1(50.292,33.02) ; v1(56.896,33.02) 58.166,31.75 v1(60.81,31.75) ; v1(67.31,31.75) 67.818,31.242 v1(69.85,31.242)
BTN3: R14.2 S3.1 U2.13 | length 79.3
  Top Layer w0.2: S3.1 34.248,4.784 44.196,14.732 70.104,14.732 v1(80.518,25.146) ; v1(80.518,27.432) 80.518,30.105 82.652,32.239 U2.13
  Bottom Layer w0.2: S3.1 28.834,4.784 R14.2 ; v1(80.518,25.146) v1(80.518,27.432)
BTN4: R15.2 S4.1 U2.14 | length 91.5
  Top Layer w0.2: S4.1@10.406,28.359 16.921,21.844 v1(37.084,21.844) ; v1(38.862,21.844) 73.406,21.844 v1(76.962,25.4) ; v1(81.28,29.718) 83.058,31.496 83.058,36.83 83.452,37.224 U2.14
  Bottom Layer w0.2: R15.2 10.406,31.551 S4.1@10.406,28.359 ; v1(37.084,21.844) v1(38.862,21.844) ; v1@76.962,25.146 v1(76.962,25.4) v1(81.28,29.718)
BTN5: R16.2 S5.1 U1.42 U2.15 | length 55.8
  Top Layer w0.2: U1.42 59.068,40.77 68.95,30.888 68.95,30.869 71.049,28.77 71.361,28.77 71.811,28.32 R16.2 71.92,27.911 S5.1 ; v1(83.566,30.226) 83.566,35.741 84.252,36.427 U2.15
  Bottom Layer w0.2: S5.1 73.405,23.368 83.566,23.368 84.582,24.384 84.582,29.21 v1(83.566,30.226)
BTN6: R17.2 S6.1 U1.43 U2.26 | length 59.5
  Top Layer w0.2: U1.43 59.568,40.765 69.3,31.033 69.3,31.014 71.194,29.12 74.967,29.12 76.067,28.02 R17.2 78.872,26.162 85.429,26.162 S6.1 93.472,34.205 v1(93.472,37.084) ; U2.26 v1(93.472,42.329)
  Bottom Layer w0.2: v1(93.472,37.084) v1(93.472,42.329)
CDONE: U1.7 U3.23
CLK_16.000MHZ: U1.44 U2.8 U4.3 | length 37.5
  Top Layer w0.2: U1.44 60.068,40.829 68.681,32.216 71.686,32.216 U4.3 76.613,37.143 76.613,42.432 77.15,42.968 78.19,42.968 78.829,42.329 U2.8
CONF_HOLD: IC3.7 R47.2
CONF_MISO: IC3.2 P2.4 U3.18
CONF_MOSI: IC3.5 P2.1 U3.17
CONF_SCK: IC3.6 P7.6 R32.2 U1.15 U3.16 | length 30.4
  Top Layer w0.2: IC3.6 44.982,73.145 45.72,73.882 47.958,73.882 50.292,71.548 50.292,66.441 58.068,58.665 v1(58.068,58.286) ; v1(60.26,57.576) 60.81,57.026 60.81,56.027 61.187,55.65 61.187,55.194 61.068,55.075 U1.15
  Bottom Layer w0.2: v1(58.068,58.286) 58.778,57.576 v1(60.26,57.576)
CONF_WP: IC3.3 R46.2
D+: P1.3 U3.8 | length 38.6
  Top Layer w0.2: U3.8 24.596,57.923 24.596,61.188 24.918,61.51 24.934,61.51 29.336,65.912 29.336,67.299 34.859,72.821 34.859,75.573 v1(34.798,75.634) ; v1(43.024,83.86) 43.277,83.86 45.974,86.557 P1.3
  Bottom Layer w0.2: v1(34.798,75.634) v1(43.024,83.86)
D-: P1.2 U3.7 | length 39.4
  Top Layer w0.2: U3.7 24.186,61.273 28.986,66.073 28.986,67.444 34.309,72.766 34.29,72.785 v1(34.29,74.93) ; v1(44.196,83.82) 46.624,86.248 P1.2
  Bottom Layer w0.2: v1(34.29,74.93) 35.362,74.93 44.196,83.764 v1(44.196,83.82)
DGND: C1.2 C2.2 C3.1 C4.1 C5.1 C6.1 C7.2 C8.2 C9.1 C10.1 C11.1 C12.1 C13.1 C14.1 C20.1 C21.1 C22.1 C23.1 C24.1 C25.1 C26.1 C27.1 C28.1 C29.1 C30.2 C31.2 C32.1 C113.1 C114.1 C115.1 C116.1 C117.1 IC1.4 IC2.4 IC3.4 J1.1A J2.1A P1.5 P1.6 P1.7 P1.8 P1.9 P1.10 P1.11 P3.2 P3.10 P4.4 P5.5 P5.6 P5.7 P5.8 P5.10 P7.3 pad.3 pad.4 R6.2 R28.1 R29.1 R31.1 S1.2 S2.2 S3.2 S4.2 S5.2 S6.2 U1.EP U2.6 U2.18 U2.28 U2.39 U3.1 U3.5 U3.10 U3.11 U3.13 U3.15 U3.25 U3.35 U3.47 U3.51 U4.2 U5.6 U5.8 U6.1 U7.1 U8.1 Y1.2 Y1.4 | length 104.3
  Top Layer w0.2: C5.1 v1(1.896,64.38) ; U5.8 4.064,54.395 4.787,55.118 v1(4.787,56.935) U5.6 ; C3.1 15.366,54.156 Y1.2 ; v1(16.081,55.626) Y1.2 ; v1(17.431,66.167) 19.352,66.167 U3.51 ; C1.2 v1(20.828,74.248) ; v1(20.703,56.019) 21.186,56.501 U3.1 ; C2.2 21.059,51.841 Y1.4 17.681,51.841 17.031,52.491 17.031,52.545 16.135,53.441 Y1.2 ; U3.47 v1(21.686,70.786) ; U3.5 23.186,56.557 24.638,55.105 v1(24.638,53.742) ; C6.1 v1(27.186,78.74) ; C22.1 v1(25.4,72.517) ; U3.10 25.686,59.93 ; U3.11 26.186,59.43 25.686,59.93 ; U3.13 27.186,59.444 27.686,59.944 ; C28.1@27.186,74.232 v1(29.21,74.232) ; U3.35 27.686,69.85 v1(28.956,71.12) ; U3.15 28.186,59.444 27.686,59.944 ; C23.1 v1(30.47,50.903) ; C25.1 v1(30.69,47.498) ; U3.25 v1(32.258,63.633) ; v1(34.624,51.503) R6.2 ; C26.1@36.021,65.133 C24.1 v1(36.021,70.042) ; v1(37.356,57.168) IC2.4 ; v1(39.152,47.093) IC1.4 ; P1.5 P1.7 44.974,88.796 P1.10 P1.9 46.974,88.825 48.474,87.325 P1.6 ; IC3.4 46.318,67.235 v1(47.376,67.235) ; v1(70.104,34.678) U4.2 ; v1(75.512,51.953) R29.1 R28.1 ; v1(78.489,43.929) U2.6 ; U6.1 v1(86.836,73.882) ; U2.39 85.852,52.07 v1(86.324,52.542) ; v1(86.652,36.36) U2.18 ; C12.1 v1(89.408,32.512) ; U2.28 v1(93.459,43.929) ; 25.686,59.93 25.686,60.28 v1(26.62,61.214) 26.62,61.01 27.686,59.944
  other v1: 57.5,48.514 60.96,48.514 57.5,52.07 60.96,52.07
EECLK: R8.1 U3.62 U5.2 | length 26.5
  Top Layer w0.2: R8.1 8.636,47.42 8.636,51.117 5.842,53.911 5.842,55.372 6.135,55.665 U5.2 12.304,55.665 17.272,60.633 U3.62
EECS: R9.1 U3.63 U5.1 | length 27.1
  Top Layer w0.2: R9.1 8.888,43.69 9.906,44.708 9.906,53.594 9.105,54.395 ; U5.1 9.105,54.395 ; U3.63 17.267,60.133 12.449,55.315 10.025,55.315 9.105,54.395
EEDATA: R7.1 R10.1 U3.61 U5.3 | length 24.9
  Top Layer w0.2: R7.1 7.446,51.583 5.334,53.695 5.334,56.435 5.834,56.935 U5.3 10.091,56.935 R10.1 15.189,61.133 U3.61
FLASH_MISO1: IC2.2 U1.28 | length 18.4
  Top Layer w0.2: IC2.2 43.359,59.708 44.674,58.393 44.674,56.983 45.992,55.665 48.428,55.665 52.501,51.592 55.818,51.592 U1.28
FLASH_MISO2: IC2.3 U1.31 | length 18.3
  Top Layer w0.2: IC2.3 43.18,58.438 43.942,57.676 43.942,56.642 45.72,54.864 48.644,54.864 53.466,50.042 U1.31
FLASH_MISO3: IC2.7 U1.23 | length 13
  Top Layer w0.2: IC2.7 48.195,59.708 51.677,56.226 55.55,56.226 57.068,54.708 U1.23
FLASH_MOSI: IC2.5 U1.26 | length 10.7
  Top Layer w0.2: IC2.5 48.316,57.168 52.942,52.542 U1.26
FLASH_SCK: IC2.6 U1.25 | length 11
  Top Layer w0.2: IC2.6 47.734,58.438 53.13,53.042 U1.25
FPGA_HSYNC: Q1.2 R26.2 U1.6 | length 22.5
  Top Layer w0.2: U1.6 63.547,50.042 63.877,50.372 v1(65.024,50.372) ; v1(65.729,52.324) 65.729,54.807 70.287,59.365 70.287,64.488 R26.2 69.704,65.071 Q1.2
  Bottom Layer w0.2: v1(65.024,50.372) 65.024,51.562 65.729,52.267 v1(65.729,52.324)
FPGA_VSYNC: Q2.2 R41.2 U1.4 | length 28.7
  Top Layer w0.2: U1.4 63.632,49.042 63.682,48.992 69.361,48.992 70.654,50.285 70.654,59.237 75.881,64.464 R41.2 75.881,67.345 Q2.2
ICE_MISO: P2.2 P7.1 U1.14
ICE_MOSI: P2.3 P7.2 U1.17
LED1: D5.1 U2.40 | length 8
  Top Layer w0.2: D5.1 85.852,54.825 85.852,52.848 85.052,52.048 U2.40
LED2: D6.1 U2.41 | length 4
  Top Layer w0.2: U2.41 D6.1@84.252,53.577
LED3: R1.1 U1.39 | length 15.6
  Top Layer w0.2: U1.39 57.568,31.956 R1.1
LED4: R2.1 U1.40 | length 20.4
  Top Layer w0.2: R2.1 59.436,28.94 59.436,32.882 58.068,34.25 U1.40
LED5: R42.1 U1.41 | length 24.8
  Top Layer w0.2: R42.1 60.198,25.761 60.198,33.528 58.568,35.158 U1.41
NetC6_2: C6.2 J1.2B R30.2 | length 6.9
  Top Layer w0.2: J1.2B 19.344,79.984 R30.2 20.635,78.7 C6.2
NetD1_2: D1.2 R1.2 | length 2.8
  Top Layer w0.2: D1.2 52.742,31.485 R1.2
NetD2_2: D2.2 R2.2 | length 2.8
  Top Layer w0.2: D2.2 52.742,27.543 R2.2
NetD3_2: D3.2 R3.2 | length 2.3
  Top Layer w0.2: D3.2 7.683,68.59 R3.2
NetD4_2: D4.2 R4.2 | length 2.2
  Top Layer w0.2: D4.2 R4.2
NetD5_2: D5.2 R28.2 | length 2.9
  Top Layer w0.2: R28.2 D5.2
NetD6_2: D6.2 R29.2 | length 2.9
  Top Layer w0.2: R29.2 D6.2
NetD7_2: D7.2 R31.2 | length 2.8
  Bottom Layer w0.2: D7.2 39.135,57.902 R31.2
NetD9_2: D9.2 R42.2 | length 2.8
  Top Layer w0.2: D9.2 52.742,23.602 R42.2
NetIC3_1: IC3.1 P6.2 R45.2
NetR3_1: R3.1 U3.54 | length 9.1
  Top Layer w0.2: R3.1 12.233,68.013 15.613,64.633 U3.54
NetR4_1: R4.1 U3.55 | length 8.1
  Top Layer w0.2: R4.1 14.34,64.133 U3.55
NetR5_2: R5.2 U3.14 | length 5.7
  Top Layer w0.2: U3.14 27.686,56.781 28.448,56.019 R5.2
NetR6_1: R6.1 U3.6 | length 10.8
  Top Layer w0.2: U3.6 23.686,56.679 27.025,53.34 R6.1
NetR10_2: R10.2 U5.4 | length 3.4
  Top Layer w0.2: U5.4 9.561,58.205 R10.2
NRST: P3.6 R11.2 U1.8 U2.4 U3.24 U6.3 | length 66.3
  Top Layer w0.2: U1.8 v1(70.104,51.042) ; v1(77.724,45.529) U2.4 ; v1(77.726,47.822) 77.726,50.116 76.791,51.051 74.938,51.051 74.935,51.054 v1(72.009,51.054) 72.009,57.039 79.782,64.812 79.798,64.812 79.841,64.855 79.841,64.871 80.163,65.193 80.179,65.193 84.33,69.344 U6.3 92.172,77.724 96.266,77.724 P3.6 ; R11.2 U6.3@84.103,69.882
  Bottom Layer w0.2: v1(70.104,51.042) 70.113,51.051 v1@72.006,51.051 ; v1(77.724,45.529) v1(77.724,45.529) 77.725,47.821 v1(77.726,47.822)
OSCI: C2.1 U3.2 Y1.1 | length 7.2
  Top Layer w0.2: Y1.1 20.703,53.441 C2.1 21.686,54.424 U3.2
OSCO: C3.2 U3.3 Y1.3 | length 18.9
  Top Layer w0.2: C3.2 15.696,51.456 Y1.3 18.138,49.784 21.717,49.784 22.86,50.927 22.86,55.118 22.186,55.792 U3.3
RAM_MISO1: IC1.2 U1.37 | length 18.4
  Top Layer w0.2: IC1.2 44.347,49.633 45.212,48.768 45.212,46.484 45.875,45.821 56.235,45.821 56.568,46.154 U1.37
RAM_MISO2: IC1.3 U1.38 | length 18.7
  Top Layer w0.2: IC1.3 43.688,48.363 44.45,47.601 44.45,46.228 45.466,45.212 56.568,45.212 57.068,45.712 U1.38
RAM_MISO3: IC1.7 U1.32 | length 8.6
  Top Layer w0.2: IC1.7 47.376,49.542 U1.32
RAM_MOSI: IC1.5 U1.35 | length 9
  Top Layer w0.2: IC1.5 54.403,47.093 55.352,48.042 U1.35
RAM_SCK: IC1.6 U1.34 | length 8.9
  Top Layer w0.2: IC1.6 48.535,48.363 48.856,48.042 54.554,48.042 55.054,48.542 U1.34
RX: U2.10 U3.39 | length 84.1
  Top Layer w0.2: v1(22.86,49.784) 22.86,46.928 27.59,42.198 56.862,42.198 v1(56.896,42.164) ; v1(22.86,60.28) 22.86,61.214 25.686,64.04 U3.39 ; v1(60.706,42.164) 60.74,42.198 74.202,42.198 74.93,42.926 74.973,42.926 ; 74.719,42.672 74.973,42.926 ; v1(76.2,42.926) 74.973,42.926 ; v1(77.216,42.197) 78.684,40.729 U2.10
  Bottom Layer w0.2: v1(22.86,49.784) v1(22.86,60.28) ; v1(56.896,42.164) v1(60.706,42.164) ; v1(76.2,42.926) 76.308,42.926 76.613,42.621 76.792,42.621 v1(77.216,42.197)
SCL: P4.2 R40.2 U1.3 U2.19 | length 104.3
  Top Layer w0.2: U1.3 69.88,48.542 70.005,48.667 v1(70.113,48.667) 70.13,48.684 70.13,49.267 71.004,50.14 71.004,57.024 79.697,65.717 79.697,77.173 85.394,82.87 R40.2 86.709,83.621 P4.2 ; v1(62.818,40.132) 62.818,38.623 68.675,32.766 v1(71.374,32.766) ; v1(62.865,45.085) 62.937,45.085 65.35,47.498 v1(70.104,47.498) ; v1(73.152,32.766) 77.724,32.766 v1(80.264,35.306) ; v1(86.695,35.306) 87.452,36.063 U2.19
  Bottom Layer w0.2: v1(62.818,40.132) 62.865,40.179 v1(62.865,45.085) ; v1(70.104,47.498) 70.109,47.503 70.109,48.662 v1(70.113,48.667) ; v1(71.374,32.766) v1(73.152,32.766) ; v1(80.264,35.306) v1(86.695,35.306)
SDA: P4.1 R27.2 U1.2 U2.20 | length 91.9
  Top Layer w0.2: U1.2 62.774,48.048 70.4,48.048 ; v1(77.089,49.401) 74.549,49.401 74.546,49.404 73.191,48.048 70.4,48.048 ; v1(78.359,49.403) 80.847,49.403 v1(81.101,49.657) ; v1(81.661,48.235) 81.728,48.302 83.079,48.302 86.106,45.275 v1(86.106,43.163) ; v1(87.65,41.563) 88.252,40.961 U2.20 ; P4.1 94.742,86.868 90.932,83.058 89.582,83.058 R27.2 90.852,82.884 91.722,82.014 91.722,77.769 85.327,71.374 80.518,71.374 80.047,70.903 80.047,65.569 80.021,65.543 80.018,65.543 71.374,56.899 71.374,49.022 70.4,48.048
  Bottom Layer w0.2: v1(77.089,49.401) 77.091,49.403 v1(78.359,49.403) ; v1(81.101,49.657) 81.101,48.794 v1(81.661,48.235) ; v1@86.111,43.168 87.716,41.563 v1(87.65,41.563)
TCK_UC: P3.1 U2.21 | length 58.3
  Top Layer w0.2: U2.21 89.052,36.678 89.916,35.814 91.186,35.814 99.086,43.714 99.086,81.574 97.776,82.884 96.186,82.884 P3.1
TDI_UC: P3.9 U2.24 | length 38.4
  Top Layer w0.2: U2.24 93.815,40.729 97.948,44.862 97.948,68.168 94.996,71.12 P3.9
TDO_UC: P3.3 U2.23 | length 49.1
  Top Layer w0.2: U2.23 93.777,39.929 98.298,44.45 98.298,68.313 97.79,68.821 97.79,72.754 98.536,73.5 98.536,80.28 98.298,80.518 96.012,80.518 P3.3
TMS_UC: P3.5 U2.22 | length 50.3
  Top Layer w0.2: U2.22 89.852,37.148 90.424,36.576 91.186,36.576 98.71,44.1 98.71,71.618 v1(98.536,71.792)
  Bottom Layer w0.2: P3.5 94.996,77.868 95.996,76.868 95.996,73.422 97.536,71.882 98.446,71.882 v1(98.536,71.792)
TX: U2.9 U3.38 | length 82.7
  Top Layer w0.2: v1(23.495,54.864) 23.495,47.86 28.429,42.926 v1(56.388,42.926) ; v1(23.622,59.633) 23.622,61.387 26.186,63.951 26.186,66.762 26.086,66.862 26.086,67.504 26.186,67.604 U3.38 ; v1(60.706,42.926) 74.152,42.926 74.787,43.561 v1(77.724,43.561) ; v1(78.054,42.18) 78.705,41.529 U2.9
  Bottom Layer w0.2: v1(23.495,54.864) 23.622,54.991 v1(23.622,59.633) ; v1(56.388,42.926) v1(60.706,42.926) ; v1(77.724,43.561) 77.724,42.526 78.054,42.197 v1(78.054,42.18)
UC_MISO: U1.46 U2.2 | length 22.9
  Top Layer w0.2: U1.46 61.068,44.964 62.248,43.784 73.1,43.784 75.745,46.429 78.101,46.429 78.801,47.129 U2.2
UC_MOSI: U1.47 U2.1 | length 22.4
  Top Layer w0.2: U1.47 61.568,44.985 62.368,44.185 73.006,44.185 75.6,46.779 77.956,46.779 79.106,47.929 U2.1
uC_SCK: U1.45 U2.3 | length 23.3
  Top Layer w0.2: U1.45 60.568,44.969 62.103,43.434 73.245,43.434 75.89,46.079 78.246,46.079 78.496,46.329 U2.3
VCC_1.8V: C1.1 C27.2 C28.2 C29.2 U3.12 U3.37 U3.49 U3.64 | length 47.6
  Top Layer w0.2: v1(17.272,58.928) 17.977,59.633 U3.64 20.43,59.633 21.328,60.531 21.328,66.633 20.905,67.056 ; C1.1 19.386,71.407 U3.49 20.828,67.133 20.905,67.056 ; v1(24.892,64.133) v1(24.892,67.056) 20.905,67.056 ; v1(26.62,60.133) 26.686,60.067 U3.12 26.686,56.626 27.997,55.315 v1(28.448,55.315) v1@28.448,55.372 ; v1(26.67,67.056) 26.67,68.849 26.636,68.883 U3.37 26.686,71.056 C28.2
  Bottom Layer w0.2: C29.2 16.684,58.34 v1(17.272,58.928) ; v1(24.892,64.133) 24.892,61.976 26.62,60.248 v1(26.62,60.133) ; v1(24.892,67.056) v1(26.67,67.056) ; v1(28.448,55.315) 30.052,53.711 C27.2
VCC_5V: C7.1 C30.1 P1.1 P5.9 R43.1 R44.1 U7.3 U8.3 | length 115.2
  Top Layer w0.2: 50.673,77.343 60.15,77.343 65.216,82.409 P5.9 ; R43.1 v1(69.955,75.333) ; R44.1 v1(72.949,75.282)
  Top Layer w0.5: v2(47.274,83.931) P1.1
  Top Layer w1: v2(48.768,79.248) 50.673,77.343 54.864,73.152 v2(65.278,73.152)
  Bottom Layer w0.2: U7.3 44.948,51.726 C7.1 ; C30.1 63.91,65.042 65.151,63.801 69.518,63.801 U8.3 ; 69.088,69.342 69.955,70.209 v1(69.955,75.333) ; 70.198,68.166 72.949,70.917 v1(72.949,75.282)
  Bottom Layer w1: U7.3 44.388,77.738 47.274,80.624 ; v2(47.274,83.931) 47.274,80.742 v2(48.768,79.248) ; 65.72,72.644 70.198,68.166 70.8,67.564 U8.3
VDD_1.2V: C31.1 C32.2 C113.2 C114.2 pad.5 U1.5 U1.29 U1.30 U8.2 U8.4 | length 51.1
  Top Layer w0.2: C114.2 53.594,54.61 v1(54.61,53.594) ; U1.30 54.856,50.542 54.61,50.788 v1(54.61,51.042) U1.29 ; U1.5 v1(64.25,49.542)
  Bottom Layer w0.2: v1(54.61,53.594) v1(54.61,51.042) 58.154,51.042 58.615,51.503 63.441,51.503 64.25,52.312 ; 58.547,70.705 59.395,69.857 C32.2 65.278,69.857 68.5,66.635 ; C31.1@63.877,55.118 64.257,55.118 65.019,55.88 67.738,55.88 67.818,55.96 ; 64.516,52.578 64.25,52.312 ; C113.2 66.214,50.117 65.639,49.542 v1(64.25,49.542) 64.25,52.312 ; 67.818,55.88 67.898,55.96 67.898,55.442 pad.5 ; U8.4@68.079,57.912 U8.4
  Bottom Layer w1: 64.516,52.578 67.818,55.88 ; 67.898,55.96 68.5,56.562 U8.4
VDD_3.3V: C4.2 C5.2 C8.1 C9.2 C10.2 C11.2 C12.2 C13.2 C14.2 C20.2 C21.2 C22.2 C23.2 C24.2 C25.2 C26.2 C115.2 C116.2 C117.2 D1.1 D2.1 D3.1 D4.1 D7.1 D9.1 IC1.8 IC2.8 IC3.8 P3.4 P4.3 P7.4 pad.2 Q1.1 Q2.1 R5.1 R7.2 R8.2 R9.2 R11.1 R12.1 R13.1 R14.1 R15.1 R16.1 R17.1 R26.1 R27.1 R32.1 R33.1 R34.1 R40.1 R41.1 R45.1 R46.1 R47.1 U1.1 U1.22 U1.24 U1.33 U2.5 U2.17 U2.27 U2.29 U2.38 U3.4 U3.9 U3.20 U3.31 U3.42 U3.50 U3.56 U4.1 U4.4 U5.5 U5.7 U7.2 U7.4 | length 630.6
  Top Layer w0.2: U5.7 1.582,55.665 1.016,56.231 1.016,57.912 1.309,58.205 U5.5 2.596,60.3 C5.2 v1(10.025,62.3) ; D3.1 4.383,66.39 D4.1 5.93,64.643 v1(10.033,64.643) ; R7.2 R8.2 R9.2 6.526,41.91 8.533,41.91 13.462,46.839 ; v1(12.581,63.733) 19.286,63.733 U3.56 ; v1(14.7,42.198) 14.7,42.386 16.307,43.993 ; 14.885,45.416 8.128,38.659 8.128,26.924 19.812,15.24 26.924,15.24 v1(30.226,11.938) ; U3.50 18.203,66.633 17.018,67.818 v1(17.018,69.469) 17.018,71.501 18.034,72.517 C22.2 22.027,72.517 24.186,70.358 U3.42 ; U3.4 22.686,56.562 24.045,55.203 24.045,54.636 24.003,54.594 24.003,49.911 C25.2 27.94,49.022 27.963,49.022 ; U3.9 25.186,56.165 25.908,55.443 v1(25.908,55.422) ; v1(25.908,53.594) 26.082,53.42 C23.2 27.963,49.022 ; U3.20 31.669,61.133 v1(33.321,62.785) ; U3.31 31.624,66.633 C24.2 33.321,65.133 v1(33.321,62.785) ; v1(30.734,49.022) 27.963,49.022 ; R5.1 v1(34.671,57.865) ; IC3.8 41.884,72.594 40.236,70.946 40.236,69.85 38.493,68.106 38.493,65.633 35.645,62.785 v1(33.321,62.785) ; IC2.8 48.532,60.978 48.768,61.214 ; IC1.8 v1(49.538,50.903) ; R33.1 48.535,63.225 48.768,62.992 48.768,61.214 ; R34.1 v1(49.474,53.149) ; 48.26,41.148 49.599,39.809 D1.1 D2.1 D9.1 ; v1(49.515,61.961) 48.768,61.214 ; v1(54.102,48.77) 54.689,48.77 54.961,49.042 U1.33 ; v1(56.134,54.864) 56.568,54.43 U1.24 ; v1(57.5,55.214) 57.568,55.145 U1.22 ; U1.1 64.206,47.542 v1(64.25,47.498) ; 64.77,41.148 64.944,41.322 ; v1(65.639,56.562) 69.737,60.66 v1(69.737,62.992) 69.083,62.992 R26.1 67.504,64.581 Q1.1 ; v1(66.92,28.02) R16.1 ; 69.438,41.148 69.438,38.279 70.488,37.228 U4.1 U4.4 ; v1(70.866,62.992) 71.183,62.992 72.767,64.576 R41.1 72.951,64.806 Q2.1 ; v1(74.314,26.308) R17.1 ; U2.5 v1(82.271,44.729) ; R11.1 v1(85.028,72.582) ; C12.2 85.852,33.608 U2.17 85.852,41.148 ; U2.38 v1(86.652,51.469) ; R40.1 89.394,80.17 R27.1 v1(91.172,80.184) ; U2.27 94.09,43.129 v1(94.667,43.706) ; U2.29 92.989,44.729 v1(94.662,46.402)
  Top Layer w1: pad.2@11.176,49.125 13.462,46.839 14.885,45.416 16.307,43.993 19.153,41.148 32.258,41.148 pad.2@40.686,41.148 ; pad.2@43.474,41.148 48.26,41.148 50.546,41.148 pad.2@55.88,41.148 ; pad.2@61.568,41.148 64.77,41.148 69.438,41.148 pad.2@75.512,41.148 ; pad.2@82.804,41.148 85.852,41.148 pad.2@89.408,44.704